# Altium PCB 35x30-blackbox.PcbDoc
Units mm, origin at the board's own origin, x right, y up, seen from the top; angles counter-clockwise.
Board outline 40.57 x 45 mm, 2 copper layers (Top Layer, Bottom Layer); 35 components, 22 nets, 161 pads, 92 vias.
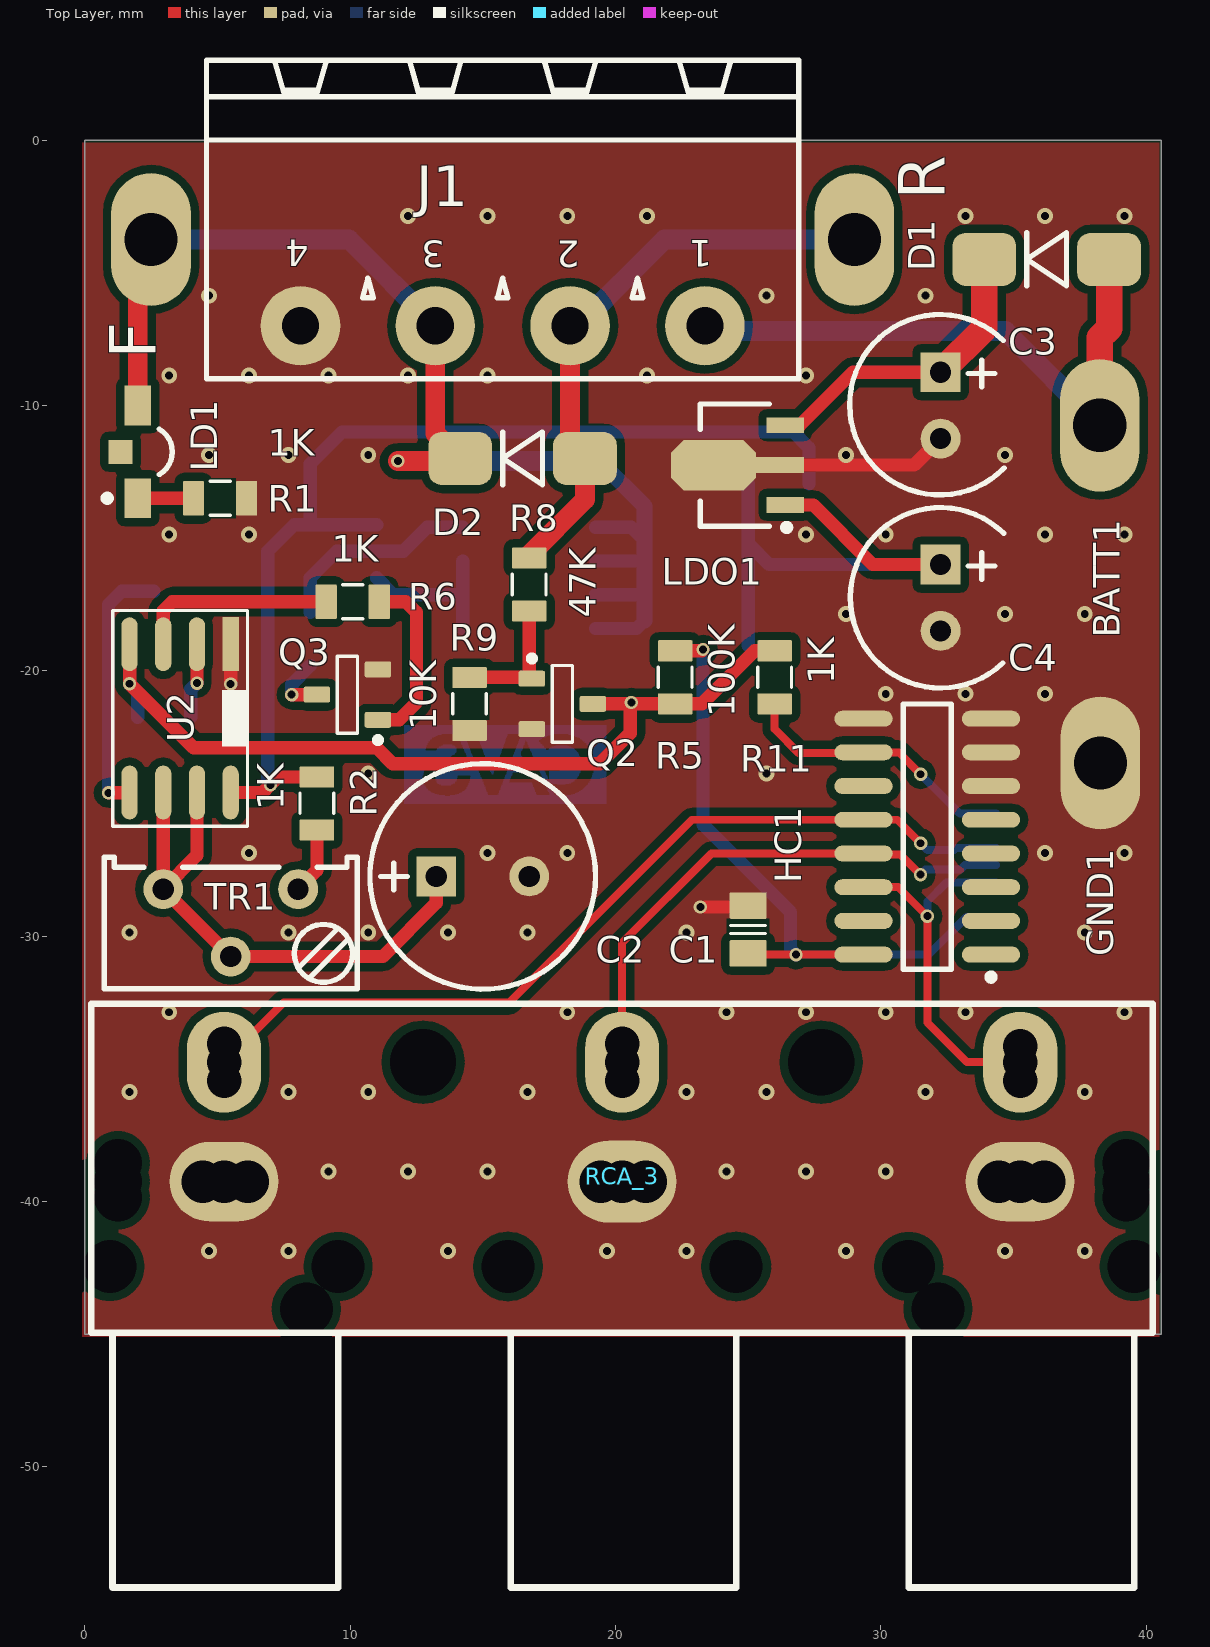
[diagram p0: Top Layer view]
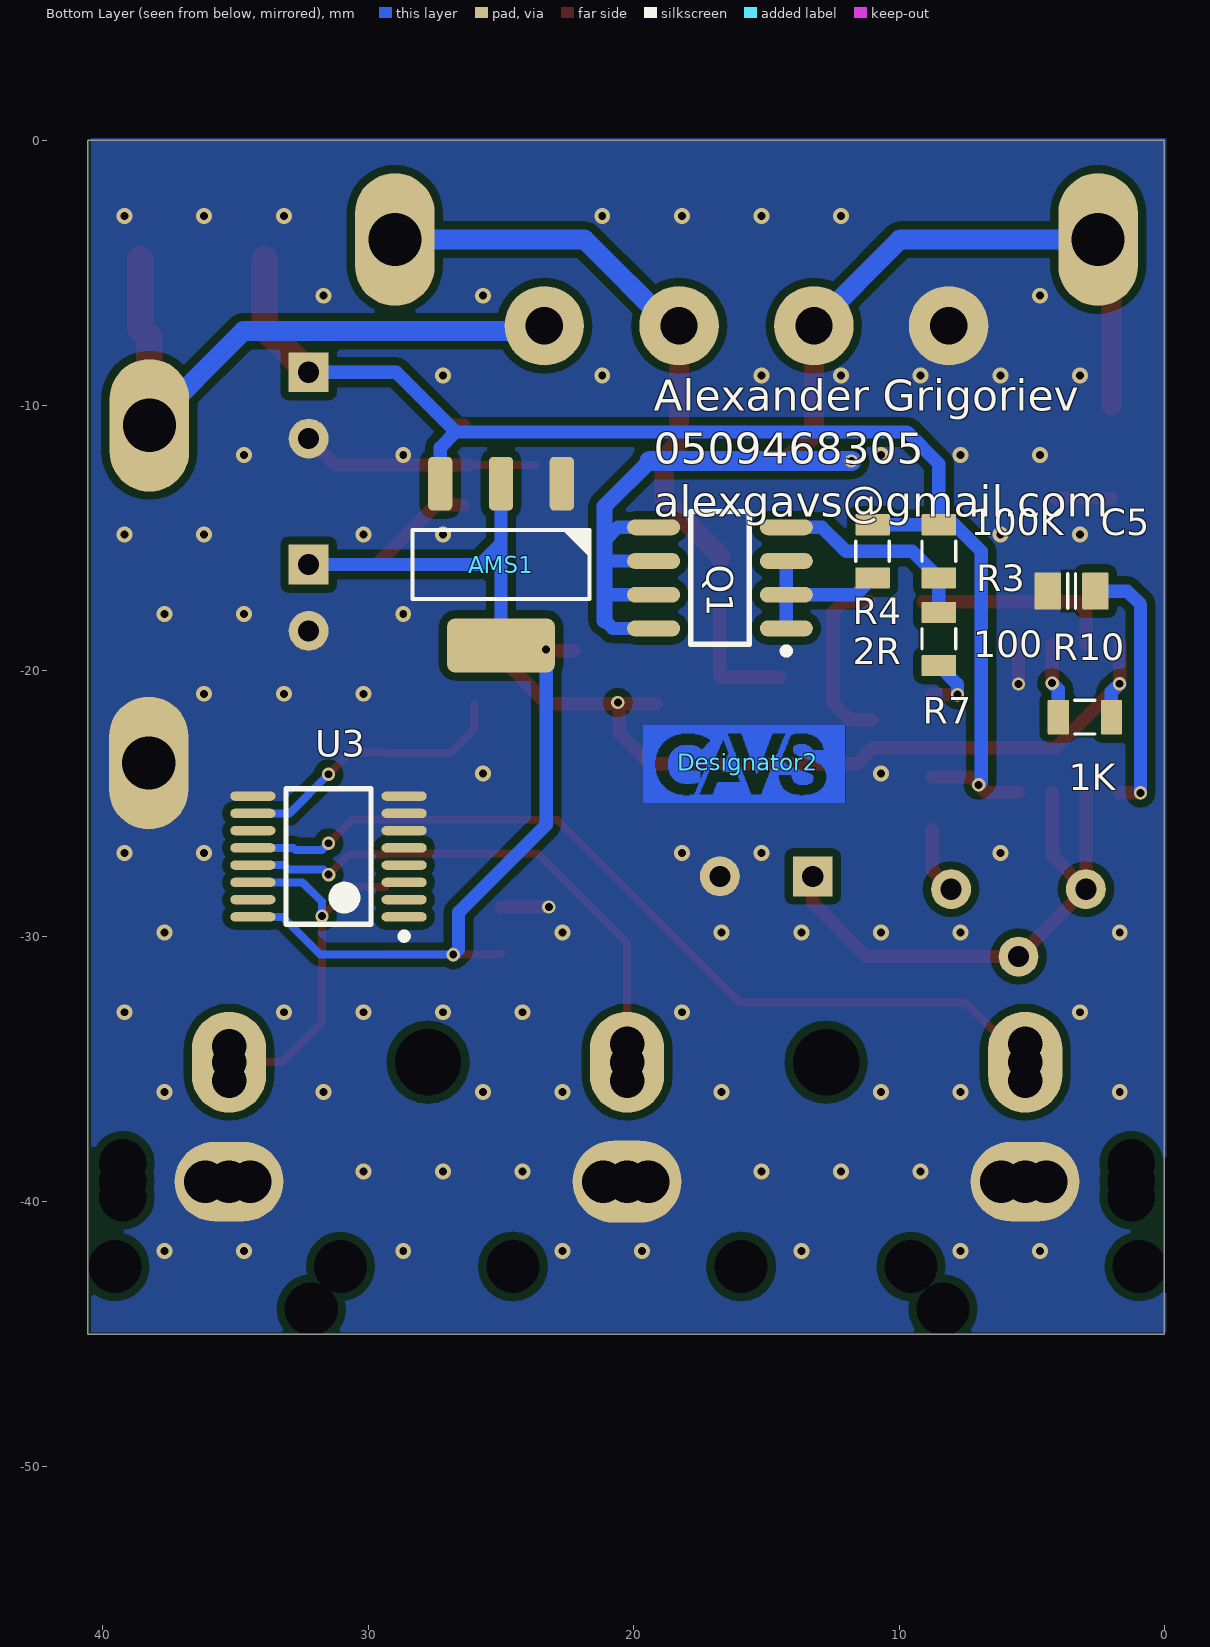
[diagram p1: Bottom Layer view, seen from below]

## Layer stack, top to bottom
Top Solder: solder mask 0.0102, Solder Resist, Dk 3.5
Top Layer: signal copper 0.0356
Dielectric 1: dielectric 0.32, FR-4, Dk 4.8
Bottom Layer: signal copper 0.0356
Bottom Solder: solder mask 0.0102, Solder Resist, Dk 3.5

## Board outline
0,-45 40.575,-45 40.575,0 0,0

## Design rules (kind name [scope] priority, off if disabled: settings)
Clearance LOGO [InUnion(1048600) or InUnion(1048601)] p1: gap=0 ignorepadtopadclearanceinfootprint=FALSE
Clearance POLYGON_GND [(InNamedPolygon('TopLayer-gnd') OR InNamedPolygon('Bottom Layer-gnd'))] p2: gap=0.3 ignorepadtopadclearanceinfootprint=FALSE
Clearance [All] p3: gap=0.152 ignorepadtopadclearanceinfootprint=FALSE except(0: Arc-Hole Track-Hole SMDPad-Hole THPad-Hole Via-Hole Fill-Hole Poly-Hole Region-Hole Text-Hole)
HoleSize [All] p1: absolutevalues=TRUE maxlimit=6.3 minlimit=0.125 maxpercent=80.000 minpercent=20.000
HoleToHoleClearance [All] p1 off: gap=0.254 allowstackedmicrovias=TRUE
MinimumAnnularRing [All] p1: minimumring=0.1
MinimumSolderMaskSliver [All] p1: minsoldermaskwidth=0.1
PolygonConnect [All] p1: connectstyle=Direct reliefconductorwidth=0.254 reliefentries=4 polygonreliefangle="90 Angle" airgapwidth=0.254
RoutingVias [All] p1: holewidth=0.5 width=0.5 viastyle="Through Hole" minholewidth=0.3 minwidth=0.5 maxholewidth=0.4 maxwidth=1
SMDNeckDown [All] p1: percent=95.000
ShortCircuit ShortCircuit_1 [All] p1: allowed=FALSE
ShortCircuit ShortCircuitHoles [InUnion(1048602)] p2: allowed=TRUE
SilkToSilkClearance [All] p1 off: silktosilkclearance=0.01
SilkToSolderMaskClearance [IsPad] p1: minsilkscreentomaskgap=0.1 clearancetoexposedcopper=TRUE
SolderMaskExpansion [All] p1: expansion=0.2
Width Width_Logo [InUnion(1048600) or InUnion(1048601)] p1: maxlimit=1 minlimit=2539.975 preferedwidth=0.254 toplayer_minwidth=0 bottomlayer_minwidth=0 minimp=50.000000 maximp=50.000000 favimp=50.000000
Width Width_Power [InNetClass('Power')] p2: maxlimit=2 minlimit=0.3 preferedwidth=0.5
Width [All] p3: maxlimit=2 minlimit=0.254 preferedwidth=0.254
24 further rules are at their usual default settings.

## Components (designator, comment, footprint, x,y, rotation, side; value= is the part's Value field where it differs from the comment)
AMS1 "AMS1117" SOT223-3 25,-16 r0 bottom
BATT1 "CON1" J_1 38.25,-10.75 r270 top
C1 "Cap_0805" CAP_0805 25,-29.75 r270 top value=100nF
C2 "100uF" CAPPR350-850X800 15,-27.75 r0 top
C3 "10uF" CAPPR250-680X600 32.25,-10 r270 top
C4 "10uF" CAPPR250-680X600 32.25,-17.25 r270 top
C5 "Cap_0805" CAP_0805 3.5,-17 r180 bottom value=10nF
D1 "GS1M" DO214AA 36.25,-4.5 r180 top
D2 "GS1M" DO214AA 16.5,-12 r180 top
Designator2 "Comment" "LOGO GAVS Normal" 15.7,-23.45 r180 bottom
F "CON1" J_1 2.5,-3.75 r270 top
GND1 "CON1" J_1 38.275,-23.475 r90 top
HC1 "MC74HC4052AD" 751B-05_N 31.75,-26.25 r180 top
J1 "Family" PHOENIX_1757268 15.75,-7 r180 top
LD1 "Red" LED_AVAGO_HSMC-C110 2,-11.75 r90 top
LDO1 "L78L05ABUTR" SOT-89_N 24.5,-12.25 r180 top
Q1 "SI4435DY" SO-8_N 16.75,-16.5 r0 bottom
Q2 "MBT2222" SOT23-3 18,-21.25 r0 top
Q3 "MBT2222" SOT23-3 9.9,-20.9 r180 top
R "CON1" J_1 29,-3.75 r270 top
R1 "1K" RES_0805 5.1,-13.5 r180 top
R2 "1K" RES_0805 8.75,-25 r90 top
R3 "100K" RES_0805 8.5,-15.5 r270 bottom
R4 "2R" RES_0805 11,-15.5 r90 bottom
R5 "100K" RES_0805 22.25,-20.25 r90 top
R6 "1K" RES_0805 10.1,-17.4 r180 top
R7 "100" RES_0805 8.5,-18.8 r90 bottom
R8 "47K" RES_0805 16.75,-16.75 r270 top
R9 "10K" RES_0805 14.5,-21.25 r90 top
R10 "1K" RES_0805 3,-21.75 r0 bottom
R11 "1K" RES_0805 26,-20.25 r270 top
RCA_3 "RCA3" RCAX3 20.25,-34.75 r0 top
TR1 "1M" TRIM_BOURNS_3296Y 5.5,-29.5 r180 top
U2 "NE555" SO8 5.5,-19 r270 top
U3 "MC74HC4052DT" 948F-01_N 31.5,-27 r0 bottom

## Footprints (in the part's own frame and the unit in brackets; to place one, negate y for a bottom-side part, rotate by r counter-clockwise, add the part's x,y. Pads: shape width x height; smd on the part's side, far side on the other; paste and mask are expansions set on the pad)
751B-05_N [mm] "SOIC, 16-Leads, Body 9.9x3.9mm, Pitch 1.27mm, IPC Medium Density"
  oval 2.2x0.6 smd: 1(-2.4,4.445) 2(-2.4,3.175) 3(-2.4,1.905) 4(-2.4,0.635) 5(-2.4,-0.635) 6(-2.4,-1.905) 7(-2.4,-3.175) 8(-2.4,-4.445) 9(2.4,-4.445) 10(2.4,-3.175) 11(2.4,-1.905) 12(2.4,-0.635) 13(2.4,0.635) 14(2.4,1.905) 15(2.4,3.175) 16(2.4,4.445)
  silkscreen extent -2.53,-5 0.9,5.42, body extent -2,-5 2,5, height 1.75
948F-01_N [mm] "TSOP, 16-Leads, Body 5x4.4mm, Pitch 0.65mm, IPC Medium Density"
  oval 1.7x0.35 smd: 1(-2.85,2.275) 2(-2.85,1.625) 3(-2.85,0.975) 4(-2.85,0.325) 5(-2.85,-0.325) 6(-2.85,-0.975) 7(-2.85,-1.625) 8(-2.85,-2.275) 9(2.85,-2.275) 10(2.85,-1.625) 11(2.85,-0.975) 12(2.85,-0.325) 13(2.85,0.325) 14(2.85,0.975) 15(2.85,1.625) 16(2.85,2.275)
  silkscreen extent -2.97,-2.55 1.6,3.12, body extent -2.25,-2.55 2.25,2.55, height 1.2
CAP_0805 [mm] "Chip Capacitor, Body 2.0x1.2mm, 0805, IPC Medium Density"
  round 0.254 on Mech14: 0(0,0)
  rrect10% 1x1.4 smd: 1(-0.9,0) 2(0.9,0)
  Top Layer pour cut-out: -0.4,0.8 0.4,0.8 0.4,-0.8 -0.4,-0.8
  silkscreen extent -0.15,-0.65 0.15,0.65, body extent -1.1,-0.72 1.1,0.73, height 1.34
CAPPR250-680X600 [mm] "Capacitor, Radial, Pin spacing 2.5mm - Body Diameter 6.8mm X Body Height 6.0mm"
  rect 1.5x1.5 hole 0.8: 1(-1.25,0)
  round 1.5 hole 0.8: 2(1.25,0)
  silkscreen extent -3.42,-3.42 3.37,2.4, body extent -3.41,-3.41 3.39,3.39, height 6
CAPPR350-850X800 [mm] "Capacitor, Radial, Pin spacing 3.5mm - Body Diameter 8.5mm x Body Height 8.0mm"
  rect 1.5x1.5 hole 0.8: 1(-1.75,0)
  round 1.5 hole 0.8: 2(1.75,0)
  silkscreen extent -4.25,-4.25 4.25,4.25, body extent -4.25,-4.25 4.25,4.25, height 8
DO214AA [mm]
  rrect50% 2.4x2 smd: 1(-2.35,0)
  rrect50% 2.4x2 smd mask+0.102: 2(2.35,0)
  silkscreen extent -0.75,-1 0.75,1, body extent -2.75,-1.4 2.75,1.4, height 2.5
J_1 [mm]
  oval 5x3 hole 2: 1(0,0)
LED_AVAGO_HSMC-C110 [mm] "Red Chip LED, 2-Leads, Body 3.3x1.6mm, Side Emitting Package"
  rect 1.5x1 smd: 1(-1.75,0) 2(1.75,0)
  rect 0.9x0.9 smd: 3(0,0.65)
  silkscreen extent -1.87,-1.3 0.86,1.27, body extent -1.65,-1.3 1.65,0.3, height 1
"LOGO GAVS Normal" [mm]
  Top Layer drawing of 601 lines, arcs and shapes, not listed
PHOENIX_1757268 [mm] "PHOENIX MSTBA Serie, Pitch 5.08mm, 12A, 250V, 4 Positions Header"
  round 3 hole 1.4: 1(-7.62,0) 2(-2.54,0) 3(2.54,0) 4(7.62,0)
  silkscreen extent -11.16,-10 11.16,2, body extent -11.16,-10 11.16,2, height 8.6
RCAX3 [mm]
  round 1.6 hole 1.8 paste+0 mask+0: 0(-19,-5.1) 0(-19,-3.8) 0(19,-5.1) 0(19,-3.8)
  oct 0x0 hole 1.8: 0(-19,-4.5)
  round 1.524 hole 1.8: 0(19,-4.5)
  round 1.6 hole 1.6 paste+0 mask+0: 1(-15.8,-4.5) 1(-14.1,-4.5) 3(-0.8,-4.5) 3(0.9,-4.5) 5(14.2,-4.5) 5(15.9,-4.5)
  oval 4.1x3 hole 1.6: 1(-15,-4.5) 5(15,-4.5)
  round 0 hole 1.3 paste+0 mask+0: 2(-15,-0.7) 2(-15,0.7) 4(0,-0.7) 4(0,0.7) 6(15,-0.7) 6(15,0.6)
  oval 2.8x3.8 hole 1.3: 2(-15,0) 4(0,0) 6(15,0)
  oval 4.1x3.1 hole 1.6: 3(0,-4.5)
  round 0 hole 2.5: 7(-7.5,0) 7(7.5,0)
  round 0 hole 2: 8(-11.9,-9.3) 8(11.9,-9.3) 9(-19.3,-7.7) 9(-10.7,-7.7) 9(-4.3,-7.7) 9(4.3,-7.7) 9(10.8,-7.7) 9(19.3,-7.7)
  silkscreen extent -20,-19.8 20,2.2, body extent -20,-18 20,1.6, height 12
RES_0805 [mm] "Chip Resistor, Body 2.0x1.2mm, 0805, IPC Medium Density"
  round 0.254 on Mech14: 0(0,0)
  rrect10% 0.8x1.3 smd: 1(-1,0) 2(1,0)
  Top Layer pour cut-out: -0.6,0.75 0.6,0.75 0.6,-0.75 -0.6,-0.75
  silkscreen extent -0.38,-0.64 0.38,0.63, body extent -1.1,-0.67 1.1,0.68, height 0.69
SO8 [mil]
  rect 80x24 smd: 1(0,0)
  oval 80x24 smd: 2(0,-50) 3(0,-100) 4(0,-150) 5(220,-150) 6(220,-100) 7(220,-50) 8(220,0)
  silkscreen extent -50,-175 270,25, body extent -5,-172 222,22, height 57
SO-8_N [mm] "SOIC, 8-Leads, Body 4.9x3.9mm, Pitch 1.27mm, IPC Medium Density"
  oval 2x0.6 smd: 1(-2.5,1.905) 2(-2.5,0.635) 3(-2.5,-0.635) 4(-2.5,-1.905) 5(2.5,-1.905) 6(2.5,-0.635) 7(2.5,0.635) 8(2.5,1.905)
  silkscreen extent -2.62,-2.5 1.1,2.88, body extent -2,-2.5 2,2.5, height 1.75
SOT23-3 [mm] "SOT23, 3 pin"
  round 0.5 on Mech14: 0(0,0)
  rrect25% 1x0.6 smd: 1(-1.15,0.95) 2(-1.15,-0.95) 3(1.15,0)
  silkscreen extent -1.25,-1.45 0.38,1.81, body extent -1.4,-1.45 1.4,1.45, height 1.29
SOT223-3 [mil]
  rrect40% 36x80 smd: 1(-90.16,-120) 2(0,-120) 3(90.16,-120)
  rrect30% 160x80 smd: 4(0,120)
  silkscreen extent -131,-51 131,51, body extent -132,-144 132,144, height 71
SOT-89_N [mm] "SOT89, 3-Leads, Body 4.5x2.4 mm, Pitch 1.5mm, Lead Span 4.1mm, IPC Medium Density"
  rect 1.4x0.6 smd: 1(-1.9,1.5) 3(-1.9,-1.5)
  rect 1.8x0.6 smd: 2(-1.7,0)
  oct 3.2x1.9 smd: 2(0.8,0)
  silkscreen extent -2.08,-2.3 1.3,2.47, body extent -1.3,-2.3 1.3,2.3, height 1.6
TRIM_BOURNS_3296Y [mm] "Trimming Potentiometer BOURNS 3296Y Series"
  round 1.5 hole 0.8: 1(-2.54,-1.27) 2(0,1.27) 3(2.54,-1.27)
  silkscreen extent -4.77,-2.48 4.76,2.49, body extent -4.76,-2.47 4.77,2.49, height 11.49

## Part data
AMS1: "Power"
C1: "Capacitor", Supplier Part Number 1=80-C0805C104K3R, Supplier 1=Mouser
C2: library part CAER_100UF_25V_20%_RUBYCON_25ML100M8X7, "Polarised capacitor", Case="LS3.5 D8.5 x H8", Manufacturer=RUBYCON, Manufacturer Part Number=25ML100M8X7, Tolerance=±20%, Voltage=25V, Author="CERN DEM JMW", ComponentHeight=8mm, Component Type=Standard, CreateDate=17/11/2008, HelpURL=\\cern.ch\dfs\Applications\Altium\Datasheets\CAER_RUBYCON_25ML100M8X7.pdf, LatestRevisionDate=08/05/2013, Mounted=Yes, Part Description="Aluminum Electrolytic Capacitor, (ML Series)", Part Number=CAER_100UF_25V_20%_RUBYCON_25ML100M8X7, Pin Count=2, SMD=No, Socket=No, Status=None, Table="Capacitors THD"
C3 C4: library part CAER_10UF_25V_20%_250-680X780_LESR0R055, "Polarised capacitor", Case="LS2.5 D6.8 x H6", Manufacturer="SANYO OS-CON", Manufacturer Part Number=25SP10M, Tolerance=±20%, Voltage=25V, Author="CERN DEM JLC", ComponentHeight=6mm, Component Type=Standard, CreateDate=1/29/2008, HelpURL=\\cern.ch\dfs\Applications\Altium\Datasheets\CAER-LESR_SANYO_SP.pdf, LatestRevisionDate=6/17/2010, Mounted=Yes, Part Description="Low ESR 0R055 Aluminum Solid Capacitor With Organic Semiconductive Electrolyte", Part Number=CAER_10UF_25V_20%_250-680X780_LESR0R055, Pin Count=2, SMD=No, Socket=No, Status=Preferred, Table="Capacitors THD"
C5: "Capacitor", Supplier Part Number 1=2280935, Supplier 1=Farnell
D1 D2: library part "DIOD GS1M", "SMD диод", DataSheet=www.datasheetcatalog.org/datasheet/jgd/GS1D.pdf, PartNumber=GS1M, SMD_DIP=SMD, Корпус="DO214AA (SMA)", Поставщик=Temys, Упаковка=лента
HC1: "Analog Multiplexer/Demultiplexer", Supplier Part Number 1=1201328, Code_IPC=SOIC127P600-16, Code_JEDEC=MS-012-AC, ComponentLink1Description="Manufacturer Link", ComponentLink1URL=http://www.onsemi.com/site/products/parametrics/0,4446,47,00.html, ComponentLink2Description=Datasheet, ComponentLink2URL=http://www.onsemi.com/pub/Collateral/MC74HC4051A-D.PDF, DatasheetVersion=Mar-2000, LatestRevisionDate=13-Apr-2006, LatestRevisionNote="IPC-7351 Footprint Added.", PackageDescription="16-Pin Small Outline Integrated Circuit 1.27 mm Pitch", PackageReference=751B-05, PackageVersion=May-1997, Published=17-Jul-2002, Publisher="Altium Limited", Supplier 1=Farnell
J1: library part PHOENIX_1757268, "Connector 4 Male", Manufacturer="PHOENIX CONTACT", Manufacturer Part Number="1757268 (MSTBA 2,5/ 4-G-5,08)", Author="CERN DEM JLC", ComponentHeight=8.6mm, Component Type=Standard, CreateDate=2/10/2010, HelpURL=\\cern.ch\dfs\Applications\Altium\Datasheets\PHOENIX_1757268.pdf, LatestRevisionDate=4/26/2010, Mounted=Yes, Part Description="12A, 250V, Pitch 5.08mm, 4 Positions Header", Part Number=PHOENIX_1757268, Pin Count=4, SMD=No, Socket=No, Status=None, Table=PHOENIX
LD1: library part LED_AVAGO_HSMC-C110, "LED Red 1C 2A", Manufacturer="AVAGO TECHNOLOGIES", Manufacturer Part Number=HSMC-C110, Supplier Part Number 1=630-HSMC-C110, Author="CERN DEM JMW", Color=Red, ComponentHeight=1.1mm, ComponentLink1Description="Design Guide", ComponentLink1URL=\\cern.ch\dfs\Applications\Altium\Datasheets\LED_AVAGO_HSMC-C110_DESIGN-GUIDE.pdf, Component Type=Standard, CreateDate=30/07/2009, HelpURL=\\cern.ch\dfs\Applications\Altium\Datasheets\LED_AVAGO_HSMC-C110.pdf, LatestRevisionDate=20/06/2012, Mounted=Yes, PackageDescription="Red Chip LED, 2-Leads, Body 3.3x1.6mm, Side Emitting Package", Part Description="High Performance Right Angle Chip Red LED", Part Number=LED_AVAGO_HSMC-C110, Pin Count=2, SMD=Yes, Socket=No, Supplier 1=Mouser, Table="LEDs & Displays"
LDO1: "Positive Voltage Regulator, 5V, 4-Pin SOT-89, Tape and Reel", Supplier Part Number 1=31Y2531, ComponentLink1Description="Manufacturer URL", ComponentLink1URL=http://www.st.com, ComponentLink2Description=Datasheet, ComponentLink2URL=http://www.st.com/internet/com/TECHNICAL_RESOURCES/TECHNICAL_LITERATURE/DATASHEET/CD00000446.pdf, DatasheetVersion=Feb-2011, PackageDescription="3-Pin SOT-89 Package 1.5 mm Pitch, 4.1 mm Lead Span", PackageReference=SOT-89, PackageVersion=2011, PartNumber=L78L05ABUTR, Supplier 1=Newark
Q1: "P-Channel 30V (D-S) Rated  MOSFET", Supplier Part Number 1=942-SI4435DYPBF, ComponentLink1Description="Manufacturer Link", ComponentLink1URL=http://www.vishay.com/, ComponentLink2Description=Datasheet, ComponentLink2URL=http://www.vishay.com/docs/70149/70149.pdf, DatasheetVersion=6-Oct-1997, LatestRevisionDate=13-Apr-2006, LatestRevisionNote="IPC-7351 Footprint Added.", PackageDescription="8-Pin Small Outline Integrated Circuit 1.27 mm Pitch", PackageReference=SO-8, PackageVersion=Aug-1998, Published=8-Jun-2000, Publisher="Altium Limited", Supplier 1=Mouser
Q2 Q3: library part NPN_MMBT2222A, "Transistor SMD NPN 40V 600mA 250mW SOT23-3", Manufacturer 1="Fairchild Semiconductor", Manufacturer 2="NXP Semiconductors", Manufacturer Part Number 1=MMBT2222A, Package / Case=SOT-23, Ratings="40V; 600mA; 250mW", Supplier Part Number 1=MMBT2222AFSTR-ND, Manufacturer Part Number 2=MMBT2222A, Material=Si, Mounting Type="Surface Mount", SCDType=source, Supplier 1=Digi-Key, Supplier 2=Digi-Key, Supplier Part Number 2=568-4509-2-ND
R1 R6 R10: library part Res_0805, "Resistor", Supplier Part Number 1=70484573, Supplier 1=Allied
R2 R3 R5: library part Res_0805, "Resistor", Supplier Part Number 1=70154698, Supplier 1=Allied
R4: library part Res_0805, "Resistor"
R7: library part Res_0805, "Resistor", Supplier Part Number 1=58K4710, Supplier 1=Newark
R8 R9 R11: library part Res_0805, "Resistor", Supplier Part Number 1=70264867, Supplier 1=Allied
RCA_3: library part Component_1
TR1: library part TRIM_25T_1M_BOURNS_3296Y-1-105LF, "Trimming Potentiometer", Case=3296Y, Manufacturer=BOURNS, Manufacturer Part Number=3296Y-1-105LF, Power=0.5W, Supplier Part Number 1=3296W-105LF-ND, Tolerance=±10%, Author="CERN DEM JLC", ComponentHeight=11.55mm, Component Type=Standard, CreateDate=20/10/2008, HelpURL=\\cern.ch\dfs\Applications\Altium\Datasheets\TRIM_BOURNS_3296Y.pdf, LatestRevisionDate=28/11/2012, Mounted=Yes, Part Description="25 Turn Trimming Potentiometer (Top Adjustement)", Part Number=TRIM_25T_1M_BOURNS_3296Y-1-105LF, Pin Count=3, SMD=No, Socket=No, Supplier 1=Digi-Key, Supplier 2=TME, Supplier 3=Mouser, Supplier 4=Arrow, Supplier 5=Digi-Key, Supplier 6=Farnell, Supplier 7=Mouser, Supplier 8=Allied, Supplier 9=Farnell, Supplier Part Number 2=3296Y-1-105LF, Supplier Part Number 3=652-3296Y-1-105, Supplier Part Number 4=ggKPwAKS2sB7yfOEZhzQbC3wJOBqSkwgVY0iHxrkrLU, Supplier Part Number 5=3296Y-105LF-ND, Supplier Part Number 6=1141425, Supplier Part Number 7=652-3296Y-1-105LF, Supplier Part Number 8=70154400, Supplier Part Number 9=9353542, Table="Potentiometers THD", TC=±100ppm/°C
U2: "TIMER IC", Current=200mA, Frequency=500kHz, Manufacturer=STMicroelectronics, Manufacturer Part Number=NE555DT, Operating Temperature="0°C ~ 70°C", Package / Case="8-SOIC (3.9mm Width)", Supplier Part Number=497-1962-2-ND, Voltage - Supply="4.5 V ~ 16 V", Category="Integrated Circuits (ICs)", Count=-, Packaging="Tape & Reel (TR)", RoHS="RoHS Compliant", Supplier=Digi-Key, Supplier 1=Digi-Key, Supplier Part Number 1=497-1962-2-ND, Type="555 Type, Timer/Oscillator (Single)"
U3: "Dual 4-Channel Analog Multiplexer/Demultiplexer", Supplier Part Number 1=70466412, ComponentLink1Description="Manufacturer Link", ComponentLink1URL=http://www.onsemi.com/, ComponentLink2Description=Datasheet, ComponentLink2URL=http://www.onsemi.com/pub/Collateral/MC74HC4051-D.PDF, DatasheetVersion=1995, LatestRevisionDate=12-Dec-2006, LatestRevisionNote="IPC-7351 Footprint Added.", PackageDescription="16-Pin Thin Small Outline Package 0.65 mm Pitch", PackageReference=948F-01, PackageVersion=Feb-2000, Published=15-Apr-2002, Publisher="Altium Limited", Supplier 1=Allied
BATT1 F GND1 R: SMD_DIP=SMD_DIP, Упаковка="туб лента поддон"

## Via types
v1: diameter 0.6, hole 0.3, Top Layer to Bottom Layer, tented both sides, 77 vias
v2: diameter 0.5, hole 0.3, Top Layer to Bottom Layer, tented both sides, 15 vias

## Nets (pads, with @x,y where several pads share a name; then routed paths per layer and width w, separated by ;. In a path a pad name is that pad's centre, name@x,y a point inside that pad or via, vN(x,y) a via of type N, cw(c..) or ccw(c..) an arc to the next point about the centre after c; other vN are vias at no path point)
12V: AMS1.3 C3.1 D1.2 LDO1.3 R2.2 R3.1 R4.2 U2.8 | length 58.1
  Top Layer w0.5: U2.8 6.712,-24.588 v2(7,-24.3) 7.3,-24 R2.2 ; LDO1.3 26.95,-10.75 28.95,-8.75 C3.1
  Top Layer w1: C3.1 33.9,-7.1 D1.2
  Bottom Layer w0.5: v2(7,-24.3) 6.9,-24.2 6.9,-15.5 7.9,-14.5 R3.1 ; R4.2 R3.1 ; AMS1.3 27.29,-11.59 26.7,-11 ; C3.1 28.95,-8.75 26.7,-11 ; R3.1 8.5,-12.2 9.7,-11 26.7,-11
BAT12V: BATT1.1 D1.1 J1.1 | length 22.8
  Top Layer w1: BATT1.1 38.25,-7.45 38.6,-7.1 D1.1
  Bottom Layer w0.75: J1.1 23.57,-7.2 34.7,-7.2 BATT1.1
CAMERA+12V: D2.2 F.1 J1.3 LD1.2 Q1.5 Q1.6 Q1.7 Q1.8 | length 49
  Top Layer w0.75: LD1.2 2,-4.25 F.1 ; v2(11.8,-12.1) 14.05,-12.1 D2.2 13.21,-11.06 J1.3
  Bottom Layer w0.5: Q1.8 20.795,-18.405 21.1,-18.1 ; Q1.7 21.065,-17.135 21.1,-17.1 ; Q1.6 21.065,-15.865 ; Q1.5 20.595,-14.595 ; 20.595,-14.595 21.1,-15.1 20.595,-14.595
  Bottom Layer w0.6: 19.4,-12.1 21.1,-13.8 21.1,-15.1 21.1,-17.1 21.1,-18.1
  Bottom Layer w0.75: F.1 9.96,-3.75 J1.3 ; v2(11.8,-12.1) 19.4,-12.1
FROM_REVERSE: D2.1 J1.2 R8.1 R.1 | length 21.9
  Top Layer w0.75: R8.1 16.75,-15.65 18.85,-13.55 D2.1 18.29,-11.44 J1.2
  Bottom Layer w0.75: J1.2 18.6,-7 21.85,-3.75 R.1
FRONT_AV: HC1.14 RCA_3.6 U3.14 | length 14.4
  Top Layer w0.3: HC1.14 30.655,-28.155 v2(31.75,-29.25) 31.75,-33.25 33.25,-34.75 RCA_3.6@35.25,-34.75
  Bottom Layer w0.3: v2(31.75,-29.25) 31.75,-28.702 32.477,-27.975 U3.14
FRONT_SW: Q2.3 R5.1 R10.1 R11.1 U2.4 | length 32.3
  Top Layer w0.508: U2.4 v2(1.69,-20.49) 4.1,-22.9 11,-22.9 11.6,-23.5 19.4,-23.5 20.55,-22.35 v2@20.55,-21.25 ; Q2.3 v2@20.55,-21.25 ; v2(20.6,-21.2) v2@20.55,-21.25 ; R11.1 25.25,-19.25 23.25,-21.25 R5.1 v2@20.55,-21.25
  Bottom Layer w0.508: v2(1.69,-20.49) 2,-20.8 R10.1
GND: AMS1.1 C1.1 C2.2 C3.2 C4.2 C5.1 GND1.1 HC1.6 HC1.7 HC1.8 HC1.9 J1.4 LDO1.2 Q2.2 Q3.2 R1.1 R9.1 RCA_3.1 RCA_3.3 RCA_3.5 U2.1 U3.6 U3.7 U3.8 U3.9 | length 12.1
  Top Layer w0.3: LDO1.2@23.7,-12.25 LDO1.2@26.2,-12.25
  Top Layer w0.5: v2(5.5,-20.5) U2.1 ; v2@23.4,-28.9 C1.1@25,-28.9 ; LDO1.2@26.2,-12.25 31.25,-12.25 C3.2
  other v1: 4.685,-41.868 7.685,-41.868 13.685,-41.868 19.685,-41.868 22.685,-41.868 28.685,-41.868 34.685,-41.868 37.685,-41.868 9.185,-38.868 12.185,-38.868 15.185,-38.868 24.185,-38.868 27.185,-38.868 30.185,-38.868 1.685,-35.868 7.685,-35.868 10.685,-35.868 16.685,-35.868 22.685,-35.868 25.685,-35.868 31.685,-35.868 37.685,-35.868 3.185,-32.868 18.185,-32.868 24.185,-32.868 27.185,-32.868 30.185,-32.868 33.185,-32.868 39.185,-32.868 1.685,-29.868 7.685,-29.868 10.685,-29.868 13.685,-29.868 16.685,-29.868 22.685,-29.868 37.685,-29.868 6.185,-26.868 15.185,-26.868 18.185,-26.868 36.185,-26.868 39.185,-26.868 10.685,-23.868 25.685,-23.868 30.185,-20.868 33.185,-20.868 36.185,-20.868 28.685,-17.868 34.685,-17.868 37.685,-17.868 3.185,-14.868 6.185,-14.868 27.185,-14.868 30.185,-14.868 36.185,-14.868 39.185,-14.868 4.685,-11.868 7.685,-11.868 10.685,-11.868 28.685,-11.868 34.685,-11.868 3.185,-8.868 6.185,-8.868 9.185,-8.868 12.185,-8.868 15.185,-8.868 21.185,-8.868 27.185,-8.868 4.685,-5.868 25.685,-5.868 31.685,-5.868 12.185,-2.868 15.185,-2.868 18.185,-2.868 21.185,-2.868 33.185,-2.868 36.185,-2.868 39.185,-2.868
  other v2: 23.2,-28.9
NetC2_1: C2.1 TR1.2 TR1.3 U2.6 U2.7 | length 21
  Top Layer w0.5: U2.6 TR1.3 ; U2.7 4.23,-26.96 TR1.3 ; C2.1 13.25,-28.75 11.23,-30.77 TR1.2 TR1.3
NetC5_2: C5.2 U2.5 | length 9.8
  Top Layer w0.5: v2(0.9,-24.6) 1.678,-24.6 U2.5
  Bottom Layer w0.5: v2(0.9,-24.6) 0.9,-17.5 1.4,-17 C5.2
NetLD1_1: LD1.1 R1.2 | length 2.1
  Top Layer w0.508: LD1.1 R1.2
NetQ1_1: Q1.1 Q1.2 Q1.3 R4.1 | length 6.1
  Bottom Layer w0.5: R4.1 11.635,-17.135 Q1.2 ; Q1.1 Q1.2 ; Q1.3 Q1.2
NetQ1_4: Q1.4 R3.2 R7.2 | length 7.8
  Bottom Layer w0.5: R7.2 R3.2 9.5,-15.5 12,-15.5 12.905,-14.595 Q1.4
NetQ2_1: Q2.1 R8.2 R9.2 | length 4.7
  Top Layer w0.508: R9.2 16.7,-20.25 16.75,-20.2 R8.2
NetQ3_1: Q3.1 R6.1 | length 6.7
  Top Layer w0.5: Q3.1 11.85,-21.85 12.5,-21.2 12.5,-17.8 12.1,-17.4 R6.1
NetQ3_3: Q3.3 R7.1 | length 2.3
  Top Layer w0.5: v2(7.8,-20.9) Q3.3
  Bottom Layer w0.5: v2(7.8,-20.9) 7.8,-20.5 R7.1
NetR2_1: R2.1 TR1.1 | length 2.5
  Top Layer w0.5: TR1.1 8.75,-27.52 R2.1
NetR6_2: R6.2 U2.3 | length 7.5
  Top Layer w0.5: U2.3 2.96,-17.74 3.3,-17.4 R6.2
NetR10_2: R10.2 U2.2 | length 2.8
  Top Layer w0.5: v2(4.23,-20.47) U2.2
  Bottom Layer w0.5: R10.2 4,-20.7 v2(4.23,-20.47)
REAR_AV: HC1.12 RCA_3.2 U3.12 | length 33.4
  Top Layer w0.3: RCA_3.2@5.25,-34.75 7.5,-32.5 16,-32.5 22.885,-25.615 HC1.12 30.615,-25.615 v2(31.5,-26.5)
  Bottom Layer w0.3: v2(31.5,-26.5) 31.75,-26.75 32.75,-26.75 32.825,-26.675 U3.12
TR_EN: HC1.10 R11.2 U3.10 | length 10.6
  Top Layer w0.3: R11.2 26,-22.2 26.9,-23.1 29.325,-23.1 HC1.10 30.675,-23.075 v2(31.5,-23.9)
  Bottom Layer w0.3: v2(31.5,-23.9) 32.975,-25.375 U3.10
VCC: AMS1.2 AMS1.4 C1.2 C4.1 HC1.16 LDO1.1 R5.2 U3.16 | length 47
  Top Layer w0.3: C1.2 25.045,-30.695 v2@26.8,-30.695 ; v2(26.8,-30.7) v2@26.8,-30.695 ; HC1.16 v2@26.8,-30.695
  Top Layer w0.5: R5.2 23.25,-19.25 v2(23.3,-19.2) ; LDO1.1 27.45,-13.75 29.7,-16 C4.1
  Bottom Layer w0.3: v2(26.8,-30.7) 31.8,-30.7 33.225,-29.275 U3.16
  Bottom Layer w0.5: v2(23.3,-19.2) 23.3,-25.8 26.6,-29.1 26.6,-30.5 v2(26.8,-30.7) ; AMS1.4 25,-15.2 ; AMS1.2 25,-15.2 ; C4.1 25.8,-16 25,-15.2
VIDEO_OUT1: HC1.13 RCA_3.4 U3.13 | length 20.5
  Top Layer w0.3: RCA_3.4@20.25,-34.75 20.25,-30.25 23.615,-26.885 HC1.13 29.389,-26.924 30.734,-26.924 v2(31.496,-27.686)
  Bottom Layer w0.3: v2(31.496,-27.686) 31.684,-27.498 33.002,-27.498 33.175,-27.325 U3.13
pads on no net: C1.0 C5.0 HC1.1 HC1.2 HC1.3 HC1.4 HC1.5 HC1.11 HC1.15 LD1.3 Q2.0 Q3.0 R1.0 R2.0 R3.0 R4.0 R5.0 R6.0 R7.0 R8.0 R9.0 R10.0 R11.0 RCA_3.0 RCA_3.7 RCA_3.8 RCA_3.9 U3.1 U3.2 U3.3 U3.4 U3.5 U3.11 U3.15

## Polygon pours and split planes (outlines as drawn)
GND on Bottom Layer "Bottom Layer-gnd" (solid, remove dead copper, pour order 6): -0.067,0.071 40.433,0.071 40.433,-44.929 -0.067,-44.929
GND on Top Layer "TopLayer-gnd" (solid, pour order 8): -0.087,-0.1 40.488,-0.1 40.488,-45.1 -0.087,-45.1

## Silkscreen, mask and mechanical layers (free items; w line width, h text height)
Bottom Overlay:
  text "Alexander Grigoriev / 0509468305 / alexgavs@gmail.com" at 19.25,-14.595 h2
Bottom Solder:
  rectangle: 11.35,-25.725 19.775,-21.95
Mechanical 6:
  the board outline again, w0.254
BOARD:
  lines w0.254: 77.292,0 77.394,0.102

## Dimensions
0,0 to 40.575,0 on Top Layer
40.575,0 to 40.575,-45 on Top Layer

## Text inside footprints (layer, text, board x,y; h text height)
J1: Top Overlay "3" at 13.575,-3.8 h1 r180; Top Overlay "2" at 18.65,-3.8 h1 r180; Top Overlay "1" at 23.65,-3.775 h1 r180; Top Overlay "4" at 8.45,-3.75 h1 r180
LD1: BOARD "K" at 2.25,-13.233 h1 r90